# Altium PCB Rectifier-SinglePhase-FullControlled-TCA785.PcbDoc
Units mm, origin at the board's own origin, x right, y up, seen from the top; angles counter-clockwise.
Board outline 104.65 x 120.4 mm, 2 copper layers (Top Layer, Bottom Layer); 54 components, 44 nets, 155 pads, 4 vias.
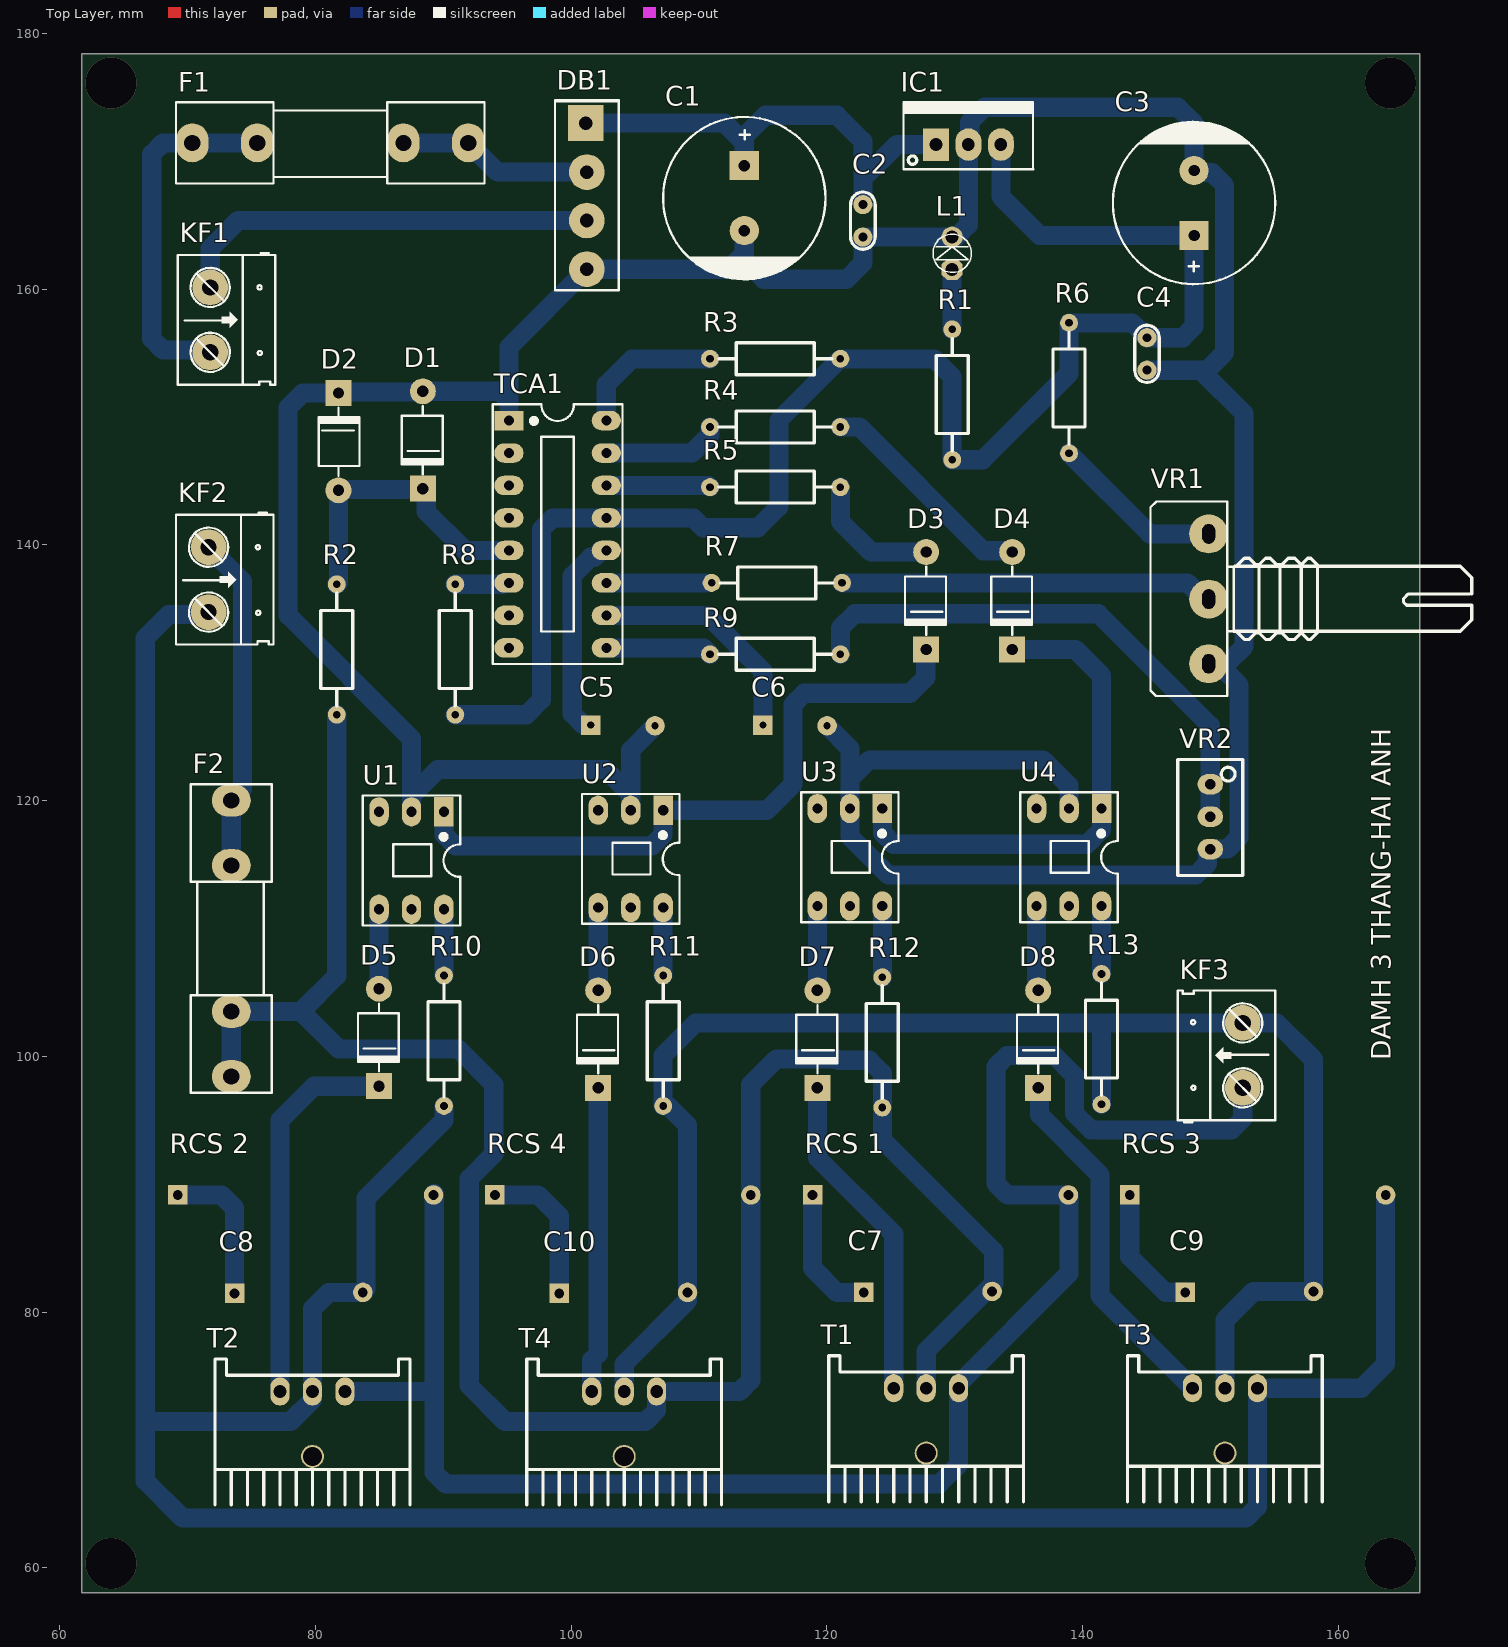
[diagram p0: Top Layer view]
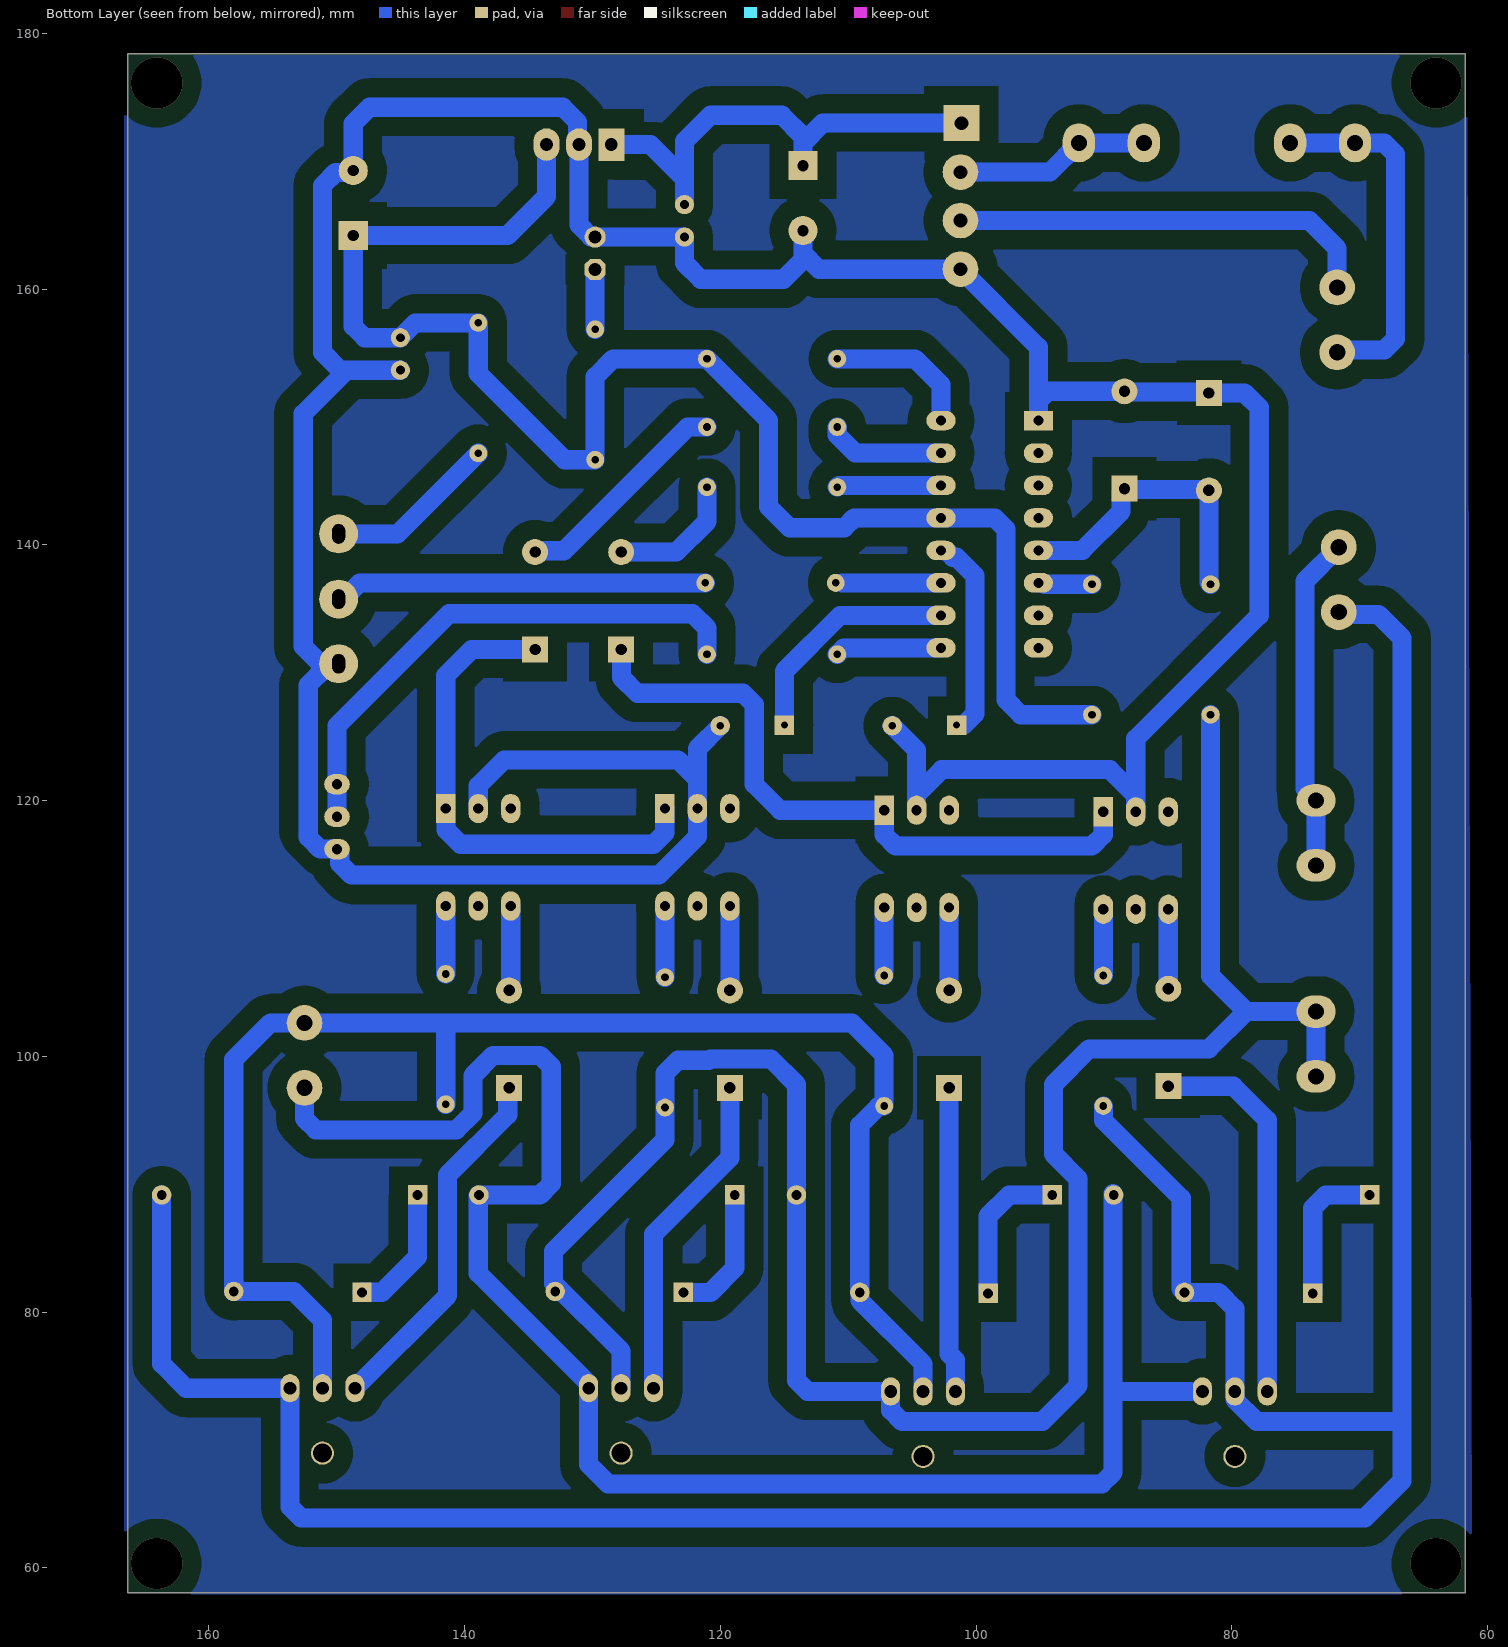
[diagram p1: Bottom Layer view, seen from below]
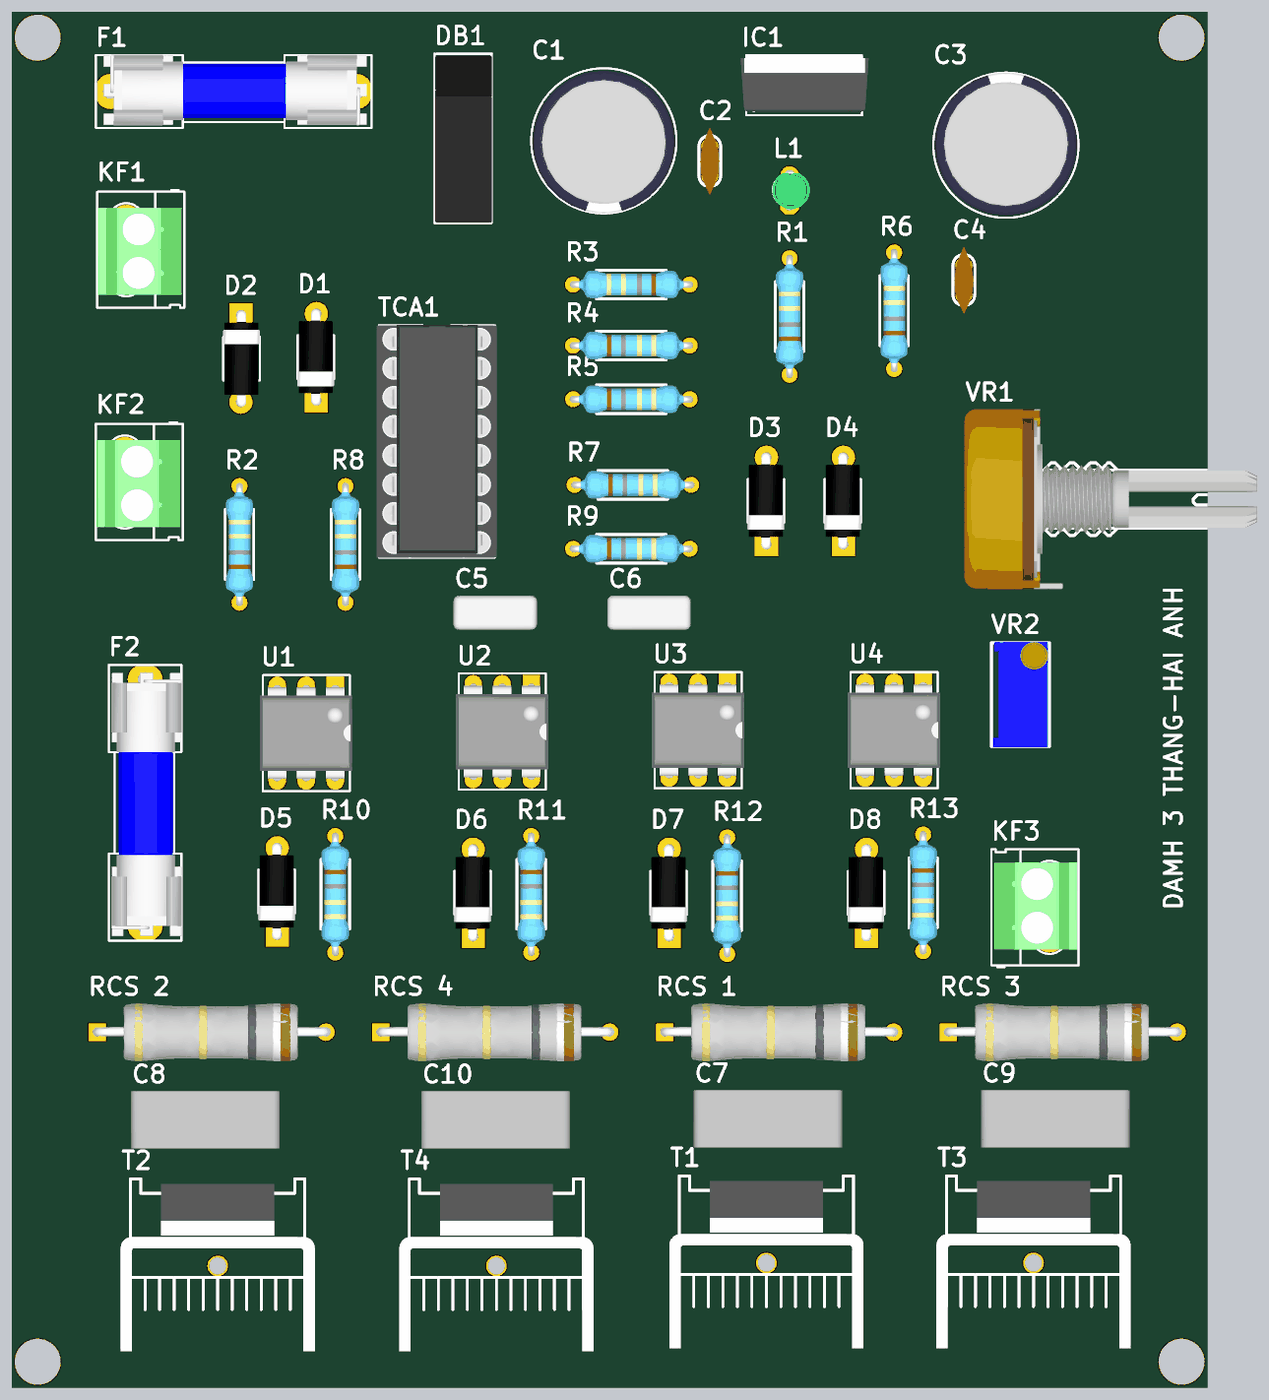
[diagram p2: 3D render of the assembled board from above, using the file's embedded part models]

## Layer stack, top to bottom
Top Solder: solder mask 0.0102, Solder Resist, Dk 3.5
Top Layer: signal copper 0.0356
Dielectric 1: dielectric 0.32, FR-4, Dk 4.8
Bottom Layer: signal copper 0.0356
Bottom Solder: solder mask 0.0102, Solder Resist, Dk 3.5

## Board outline
61.722,58.039 166.37,58.039 166.37,178.435 61.722,178.435

## Design rules (kind name [scope] priority, off if disabled: settings)
Clearance [All] p1: gap=0.5 ignorepadtopadclearanceinfootprint=FALSE
PolygonConnect [All] p1: connectstyle=Relief reliefconductorwidth=0.254 reliefentries=4 polygonreliefangle="90 Angle" airgapwidth=0.254
RoutingVias [All] p1: holewidth=0.711 width=1.27 viastyle="Through Hole" minholewidth=0.711 minwidth=1.27 maxholewidth=0.711 maxwidth=1.27
SolderMaskExpansion [All] p1: expansion=0.102 istentingtop=FALSE
Width [All] p1: maxlimit=3 minlimit=0.254 preferedwidth=1.5 minimp=50.000000 maximp=50.000000 favimp=50.000000
30 further rules are at their usual default settings.

## Components (designator, comment, footprint, x,y, rotation, side; value= is the part's Value field where it differs from the comment)
C1 "Cap Pol3" CP2/5 113.538,169.672 r270 top value=C?
C2 "104" "tu gom" 122.809,165.354 r270 top
C3 "Cap Pol3" CP2/5 148.717,164.211 r90 top value=C?
C4 "104" "tu gom" 145.034,154.94 r270 top
C5 "tu keo xanh" "tu keo xanh" 101.117,125.832 r0 top value=C?
C6 "tu keo xanh" "tu keo xanh" 114.579,125.832 r0 top value=C?
C7 "tukeotim" "tu keo" 123.063,81.534 r0 top value=C?
C8 "tukeotim" "tu keo" 73.838,81.458 r0 top value=C?
C9 "tukeotim" "tu keo" 148.209,81.534 r0 top value=C?
C10 "tukeotim" "tu keo" 99.238,81.458 r0 top value=C?
D1 "100v" "DIODE 1A" 88.392,153.289 r90 top
D2 "100v" "DIODE 1A" 81.788,143.002 r270 top
D3 "100v" "DIODE 1A" 127.762,140.716 r90 top
D4 "100v" "DIODE 1A" 134.493,140.716 r90 top
D5 "100v" "DIODE 1A" 84.963,106.553 r90 top
D6 "100v" "DIODE 1A" 102.108,106.426 r90 top
D7 "100v" "DIODE 1A" 119.253,106.426 r90 top
D8 "100v" "DIODE 1A" 136.525,106.426 r90 top
DB1 "3A 700V" "DIODE CAU 2A 3A CAM" 101.194,172.999 r270 top
F1 "520" "De Cau Chi 520 630" 81.153,171.45 r0 top
F2 "520" "De Cau Chi 520 630" 73.406,109.22 r270 top
IC1 "LM7805" QTO-220 128.524,171.323 r0 top
KF1 "CON 2 KF301" "Con 2 KF301 5.08" 71.755,160.147 r270 top
KF2 "CON 2 KF301" "Con 2 KF301 5.08" 71.628,139.827 r270 top
KF3 "CON 2 KF301" "Con 2 KF301 5.08" 152.527,97.536 r90 top
L1 "LED 3mm" LED-3MM-GREEN 129.794,161.544 r90 top
R1 "1.2k" "tro vach 1/4w" 129.794,151.765 r270 top
R2 "5m" "tro vach 1/4w" 81.661,131.826 r270 top
R3 "10R" "tro vach 1/4w" 115.951,154.559 r0 top
R4 "220R" "tro vach 1/4w" 115.951,149.225 r180 top
R5 "220R" "tro vach 1/4w" 115.951,144.526 r180 top
R6 "1.5k" "tro vach 1/4w" 138.938,152.273 r270 top
R7 "2.2k" "tro vach 1/4w" 116.078,137.033 r180 top
R8 "10k" "tro vach 1/4w" 90.932,131.826 r270 top
R9 "22k" "tro vach 1/4w" 115.951,131.445 r180 top
R10 "22K" "tro vach 1/4w" 90.043,101.219 r90 top
R11 "22K" "tro vach 1/4w" 107.188,101.219 r90 top
R12 "22K" "tro vach 1/4w" 124.333,101.092 r90 top
R13 "22K" "tro vach 1/4w" 141.478,101.346 r90 top
"RCS 1" "Res" "TRO CONG SUAT" 118.872,89.154 r0 top value=47R/3W
"RCS 2" "Res" "TRO CONG SUAT" 69.215,89.154 r0 top value=47R/3W
"RCS 3" "Res" "TRO CONG SUAT" 143.688,89.154 r0 top value=47R/3W
"RCS 4" "Res" "TRO CONG SUAT" 94.031,89.154 r0 top value=47R/3W
T1 "SCR Thyristror" scr 122.377,74.066 r180 top
T2 "SCR Thyristror" scr 74.371,73.812 r180 top
T3 "SCR Thyristror" scr 145.745,74.066 r180 top
T4 "SCR Thyristror" scr 98.755,73.812 r180 top
TCA1 "S1" "DIP16/W0.3 - duplicate" 95.123,149.733 r270 top
U1 "MOC3020" DIP6 90.043,119.126 r180 top
U2 "MOC3020" DIP6 107.188,119.253 r180 top
U3 "MOC3020" DIP6 124.333,119.38 r180 top
U4 "MOC3020" DIP6 141.478,119.38 r180 top
VR1 "10K" "Bien Tro Volume Don" 149.86,130.708 r90 top
VR2 "100K" "Bien Tro Vi Chinh Dung" 149.987,118.745 r270 top

## Footprints (in the part's own frame and the unit in brackets; to place one, negate y for a bottom-side part, rotate by r counter-clockwise, add the part's x,y. Pads: shape width x height; smd on the part's side, far side on the other; paste and mask are expansions set on the pad)
"Bien Tro Vi Chinh Dung" [mm] "Bien tro vi chinh"
  oval 1.6x2 hole 0.8: 1(-2.54,0) 2(0,0) 3(2.54,0)
  silkscreen extent -4.47,-2.54 4.6,2.54, body extent -4.54,-2.4 4.66,2.4, height 12.02
"Bien Tro Volume Don" [mil] "Volume control single"
  round 120 hole 40 slot 60 at 0 deg: 1(0,0) 2(199,0) 3(400,0)
  silkscreen extent -99,-810 500,179, body extent -110,-818 510,188, height 839
"Con 2 KF301 5.08" [mil]
  round 110 hole 50: 1(0,0) 2(200,0)
  silkscreen extent -106,-100 300,200, body extent -45,-97 255,190, height 335
CP2/5 [mil] "Tu hoa 1000uF/25V,50V"
  rect 90x90 hole 35: 1(0,0)
  round 90 hole 35: 2(200,0)
  silkscreen extent -150,-250 350,250, body extent -142,-246 350,246, height 984
"De Cau Chi 520 630" [mil] "De Fuse"
  oval 100x120 hole 50: 1(-425,0) 1(-225,0) 2(225,0) 2(425,0)
  silkscreen extent -475,-125 475,125, body extent -448,-117 459,127, height 378
"DIODE 1A" [mil] "Diode 1A"
  round 80 hole 35: 1(-50,0)
  rect 80x80 hole 35: 2(-350,0)
  silkscreen extent -305,-61 -95,65, body extent -366,-61 -34,65, height 122
"DIODE CAU 2A 3A CAM" [mil] "DIODE CAU 2A 3A CAM"
  rect 110x110 hole 42: 1(0,-2)
  round 110 hole 42: 2(151,1) 3(300,1) 4(450,1)
  silkscreen extent -70,-97 515,100, body extent -62,-95 512,102, height 650
DIP6 [mil] "6 PIN, W 300mil, Pin to pin 100mil"
  rect 60x90 hole 31.5: 1(0,0)
  oval 60x90 hole 31.5: 2(100,0) 3(200,0) 4(200,300) 5(100,300) 6(0,300)
  silkscreen extent -50,-50 250,350, body extent -58,-7 260,307, height 170
"DIP16/W0.3 - duplicate" [mil] "16 PIN, W 300mil, Pin to pin 100mil"
  rect 60x90 hole 31: 1(0,0)
  oval 60x90 hole 31: 2(100,0) 3(200,0) 4(300,0) 5(400,0) 6(500,0) 7(600,0) 8(700,0) 9(700,300) 10(600,300) 11(500,300) 12(400,300) 13(300,300) 14(200,300) 15(100,300) 16(0,300)
  silkscreen extent -50,-50 750,350, body extent -52,-57 752,356, height 299
LED-3MM-GREEN [mil]
  oct 65x65 hole 40: 1(0,0)
  round 65 hole 40: 2(100,0)
  silkscreen extent -9,-59 109,59, body extent -15,-70 112,60, height 182
QTO-220 [mil]
  rect 80x100 hole 39: 1(0,0)
  oval 80x100 hole 39: 2(100,0) 3(200,0)
  silkscreen extent -100,-76 300,130, body extent -119,-64 322,121, height 755
scr [mm]
  oval 1.5x2.2 hole 1: 1(-7.925,0.025) 2(-5.385,0.025) 3(-2.845,0.025)
  round 1.8 hole 1.5: ""(-5.385,5.105)
  silkscreen extent -13,-2.51 2.24,8.92, body extent -13.88,-2.06 3.12,12.57, height 20
"TRO CONG SUAT" [mil]
  rect 60x60 hole 30: 1(0,0)
  round 60 hole 30: 2(788,0)
  body extent -16,-101 804,99, height 493
"tro vach 1/4w" [mm]
  round 1.4 hole 0.6: 1(-5.1,0) 2(5.1,0)
  silkscreen extent -4.39,-1.25 4.42,1.25, body extent -5.38,-1.2 5.38,1.2, height 2.41
"tu gom" [mm] "Tu gom mini"
  round 1.5 hole 0.7: 1(-1.27,0) 2(1.27,0)
  silkscreen extent -2.25,-0.97 2.22,0.97, body extent -2.92,-0.85 2.92,0.85, height 6.12
"tu keo" [mil]
  rect 60x60 hole 30: 1(-7,0)
  round 60 hole 30: 2(388,3)
  body extent -66,-97 446,100, height 411
"tu keo xanh" [mil]
  rect 60x60 hole 22.13: 1(16,3)
  round 60 hole 22.13: 2(214,1)
  body extent -29,-58 258,60, height 256

## Part data
C1 C3: library part "Cap Pol3_3", "Polarized Capacitor (Surface Mount)", LatestRevisionDate=17-Jul-2002, LatestRevisionNote="Re-released for DXP Platform.", PackageReference=C0805, Publisher="Altium Limited"
C2 C4: library part "Tu gom 104 50V", "Cắm", Chung_Loai=Cắm, Don_Vi=Con, Ma_Hang=MH004761, So_Chan=2, Ten_Linh_Kien="Tụ gốm 104 100nF 50V"
C5 C6: "Polarized Capacitor (Surface Mount)", LatestRevisionDate=17-Jul-2002, LatestRevisionNote="Re-released for DXP Platform.", PackageReference=C0805, Publisher="Altium Limited"
C7 C8 C9 C10: library part "tu keo tim", "Polarized Capacitor (Surface Mount)", LatestRevisionDate=17-Jul-2002, LatestRevisionNote="Re-released for DXP Platform.", PackageReference=C0805, Publisher="Altium Limited"
D1 D2 D3 D4 D5 D6 D7 D8: library part "Diode 1N4007", "Cắm", Chung_Loai=Cắm, Don_Vi=Con, Ma_Hang=MH001063, Ten_Linh_Kien="Diode 1N4007 1A (DIP)"
DB1: library part "Diode CAU 3A", "Cắm", Chung_Loai=cắm, Don_Vi=Con, Ma_Hang=MH001207, Ten_Linh_Kien="Diode Cầu 3A 700V KBP307 ( Vuông)"
F1 F2: library part "De Cau Chi 520 630", "5x20mm", Ma_Hang=MH001473, Ten="Đế Cầu Chì 5x20MM 6x30MM SMD01"
IC1: library part LM78xx, "On ap +, from + 5 to + 24VDC"
KF1 KF2 KF3: "Cắm", Chung_Loai=Cắm, Don_Vi=Con, Ma_Hang=MH000987, Ten_Linh_Kien="CON 2 KF301-2P 5.08MM Xanh Dương"
L1: library part "LED 3mm Xanh La", "Cắm", Chung_Loai=Cắm, Don_Vi=Con, Ma_Hang=MH001054, Ten_Linh_Kien="Led 3MM Phủ Xanh (10c)"
R1 R2 R3 R4 R5 R6 R7 R8 R9 R10 R11 R12 R13: library part "Tro Vach 1/4W 5% 1.2R", "Cắm", Chung_Loai=Cắm, Don_Vi=Con, Ma_Hang=MH007350, So_Chan=2, Ten_Linh_Kien="Trở Vạch 1/4w 5% 1.2R"
"RCS 1" "RCS 2" "RCS 3" "RCS 4": library part "TRO CONG SUAT", "Resistor", Manufacturer="Generic Components", Class=Passive, Published=08/06/2000, Publisher="Altium Hobart Technology Centre", SubClass=Resistor
T1 T2 T3 T4: library part SCR_1, DVDT=50MEG, IGT=40MA, IH=50MA, K1=1, K2=1, SimulationGenericComponent=True, TON=1US, TQ=20US, VDRM=50V, VTMIN=1V
TCA1: library part "TCA 785"
U1 U2 U3 U4: library part MOC3063M
VR1: library part "Triet Ap Don 5k", "Cắm", Chung_Loai=Cắm, Don_Vi=Con, Ma_Hang=MH001416, Ten_Linh_Kien="Triết Áp Đơn B5K"
VR2: library part "Bien Tro Tinh Chinh 100R Dung", "Cắm", Chung_Loai=Cắm, Don_Vi=Con, Ma_Hang=MH003235, Ten_Linh_Kien="Biến Trở VR 101-100R 3296W"

## Via types
v1: diameter 4, hole 4, Top Layer to Bottom Layer, 4 vias

## Nets (pads, with @x,y where several pads share a name; then routed paths per layer and width w, separated by ;. In a path a pad name is that pad's centre, name@x,y a point inside that pad or via, vN(x,y) a via of type N, cw(c..) or ccw(c..) an arc to the next point about the centre after c; other vN are vias at no path point)
+15V: C3.1 C4.1 IC1.3 R1.2 R3.2 R6.1 R8.2 TCA1.13 | length 123.9
  Bottom Layer w1.5: R8.2 96.5,126.726 97.663,127.889 97.663,141.234 98.542,142.113 TCA1.13 109.547,142.113 110.309,141.351 114.598,141.351 116.238,142.992 116.238,149.746 R3.2 128.397,154.559 129.794,153.162 R1.2 132.187,146.665 138.938,153.416 R6.1 143.871,157.373 C4.1 147.828,156.21 148.717,157.099 C3.1 136.652,164.211 133.604,167.259 IC1.3
GND: C1.2 C2.2 C3.2 C4.2 C5.2 C6.2 D1.1 D2.2 DB1.4 IC1.2 L1.2 TCA1.1 U1.2 U2.2 U3.2 U4.2 VR1.1 VR2.3 | length 286.9
  Bottom Layer w1.5: U1.2 87.508,119.131 87.508,120.401 89.535,122.428 102.687,122.428 104.648,120.467 ; 87.503,120.401 87.503,124.841 77.851,134.493 77.851,150.749 78.994,151.892 D2.2 81.852,151.956 88.328,151.956 D1.1 94.361,152.019 95.123,151.257 ; TCA1.1 95.123,151.257 ; U2.2 104.648,120.467 ; C5.2 106.553,125.851 104.648,123.946 104.648,120.467 ; 113.528,162.804 112.293,161.569 DB1.4 95.123,155.473 95.123,151.257 ; C1.2 113.538,162.306 115.062,160.782 121.539,160.782 122.809,162.052 C2.2 L1.2 129.823,164.113 130.139,164.113 131.064,165.038 IC1.2 131.166,171.425 131.166,173.076 132.334,174.244 147.447,174.244 148.717,172.974 C3.2 148.867,169.141 150.098,169.141 151.11,168.128 151.11,155.047 149.733,153.67 C4.2 ; C6.2 120.015,125.851 121.793,124.073 121.793,121.666 ; U3.2@121.793,120.517 121.793,121.666 ; U3.2@121.798,120.517 121.798,119.385 U3.2 121.798,119.375 121.798,117.184 124.808,114.173 148.858,114.173 149.768,115.083 149.768,116.159 149.791,116.182 VR2.3@149.987,116.182 ; U4.2 138.933,119.385 138.933,121.163 136.906,123.19 123.317,123.19 121.793,121.666 ; 149.225,153.67 152.634,150.261 152.634,132.06 151.282,130.708 VR1.1 ; VR2.3@150.006,116.224 151.327,116.224 152.237,117.134 152.237,129.056 VR1.1@150.881,130.412
L: F2.1 KF2.1 | length 26.3
  Bottom Layer w1.5: KF2.1 74.275,137.18 74.275,120.911 73.406,120.042 73.406,120.015 F2.1@73.406,114.935
L1: "RCS 4.2" C7.2 F2.2 R2.2 R12.1 T1.2 T4.1 | length 167.3
  Bottom Layer w1.5: F2.2@73.406,98.425 73.406,103.505 78.867,103.505 ; R2.2 81.661,106.299 78.867,103.505 ; T1.2 127.762,76.962 133.045,82.245 133.045,84.76 124.333,93.472 R12.1 124.333,98.679 123.317,99.695 120.894,99.695 120.787,99.802 116.058,99.802 114.046,97.79 114.046,89.154 114.046,74.666 113.167,73.787 T4.1 106.68,72.316 105.801,71.437 94.822,71.437 92.019,74.24 92.019,90.434 93.944,92.359 93.944,97.805 91.164,100.584 81.788,100.584 78.867,103.505
N: "RCS 3.2" C8.2 KF2.2 R10.1 T2.2 T3.1 | length 236.3
  Bottom Layer w1.5: KF2.2 71.438,134.557 68.517,134.557 66.675,132.715 66.675,71.12 ; R10.1 90.043,94.996 83.947,88.9 83.947,81.794 83.693,81.54 C8.2 81.026,81.534 79.756,80.264 T2.2 79.756,73.149 78.044,71.437 66.992,71.437 66.675,71.12 ; 163.703,89.154 163.703,75.946 161.798,74.041 T3.1 153.67,64.76 152.791,63.881 69.596,63.881 66.675,66.802 66.675,71.12
NetC1_1: C1.1 C2.1 DB1.1 IC1.1 | length 37.9
  Bottom Layer w1.5: DB1.1 111.989,172.999 113.538,171.45 ; C1.1 113.538,171.958 115.189,173.609 120.777,173.609 122.809,171.577 122.809,168.656 ; C2.1 122.809,168.656 ; IC1.1 125.476,171.323 122.809,168.656
NetC5_1: C5.1 TCA1.12 | length 16.1
  Bottom Layer w1.5: C5.1 101.512,125.92 100.955,125.92 100.076,126.798 100.076,137.592 101.529,139.045 101.828,139.045 102.356,139.573 TCA1.12
NetC6_1: C6.1 TCA1.10 | length 18.3
  Bottom Layer w1.5: TCA1.10 110.631,134.493 114.986,130.139 C6.1 C6.1@114.974,125.92
NetC7_1: "RCS 1.1" C7.1 | length 10.5
  Bottom Layer w1.5: 118.872,89.154 118.872,83.439 120.777,81.534 C7.1
NetC8_1: "RCS 2.1" C8.1 | length 11.5
  Bottom Layer w1.5: 69.215,89.154 72.644,89.154 73.66,88.138 C8.1
NetC9_1: "RCS 3.1" C9.1 | length 10.3
  Bottom Layer w1.5: 143.688,89.154 143.688,84.328 146.47,81.546 148.019,81.546 C9.1
NetC10_1: "RCS 4.1" C10.1 | length 11.8
  Bottom Layer w1.5: 94.031,89.154 97.409,89.154 99.06,87.503 C10.1
NetD1_2: D1.2 D2.1 R2.1 TCA1.5 | length 23.7
  Bottom Layer w1.5: R2.1 81.788,137.053 D2.1 81.852,144.335 88.328,144.335 D1.2 88.658,144.133 88.658,142.609 91.689,139.578 95.118,139.578 TCA1.5
NetD3_1: D3.1 R5.1 | length 10.4
  Bottom Layer w1.5: R5.1 121.051,141.839 123.444,139.446 D3.1
NetD4_1: D4.1 R4.1 | length 17.5
  Bottom Layer w1.5: R4.1 122.555,149.225 132.232,139.548 134.391,139.548 D4.1
NetD5_1: D5.1 U1.4 | length 6.2
  Bottom Layer w1.5: D5.1 U1.4
NetD6_1: D6.1 U2.4 | length 6.5
  Bottom Layer w1.5: D6.1 U2.4
NetD7_1: D7.1 U3.4 | length 6.6
  Bottom Layer w1.5: D7.1 U3.4
NetD8_1: D8.1 U4.4 | length 6.7
  Bottom Layer w1.5: U4.4 136.398,105.427 136.525,105.3 D8.1
NetDB1_2: DB1.2 F1.2 | length 15.3
  Bottom Layer w1.5: F1.2@86.868,171.45 91.948,171.45 94.234,169.164 DB1.2
NetDB1_3: DB1.3 KF1.1 | length 33.4
  Bottom Layer w1.5: KF1.1 71.755,163.195 73.939,165.379 DB1.3
NetF1_1: F1.1 KF1.2 | length 28.1
  Bottom Layer w1.5: KF1.2 71.565,155.257 68.062,155.257 67.183,156.135 67.183,170.571 68.062,171.45 F1.1@75.438,171.45
NetL1_1: L1.1 R1.1 | length 4.7
  Bottom Layer w1.5: R1.1 L1.1
NetR3_1: R3.1 TCA1.16 | length 11.7
  Bottom Layer w1.5: TCA1.16 102.743,152.527 104.775,154.559 R3.1
NetR4_2: R4.2 TCA1.15 | length 9.3
  Bottom Layer w1.5: TCA1.15@102.748,147.198 109.449,147.198 110.851,148.6 R4.2
NetR5_2: R5.2 TCA1.14 | length 8.2
  Bottom Layer w1.5: TCA1.14 110.724,144.653 R5.2
NetR6_2: R6.2 VR1.3 | length 13.5
  Bottom Layer w1.5: R6.2 145.243,140.868 VR1.3
NetR7_1: R7.1 VR1.2 | length 29.2
  Bottom Layer w1.5: R7.1 148.207,137.033 149.477,135.763 VR1.2
NetR7_2: R7.2 TCA1.11 | length 7.7
  Bottom Layer w1.5: TCA1.11 R7.2@110.47,137.033
NetR8_1: R8.1 TCA1.6 | length 4.2
  Bottom Layer w1.5: R8.1 94.629,136.926 94.736,137.033 TCA1.6
NetR9_1: R9.1 VR2.1 VR2.2 | length 42.2
  Bottom Layer w1.5: R9.1 121.051,133.497 122.174,134.62 141.224,134.62 149.987,125.857 VR2.2
NetR9_2: R9.2 TCA1.9 | length 8.3
  Bottom Layer w1.5: TCA1.9 110.343,131.953 R9.2
NetR10_2: R10.2 U1.6 | length 5.2
  Bottom Layer w1.5: R10.2 U1.6
NetR11_2: R11.2 U2.6 | length 5.3
  Bottom Layer w1.5: R11.2 U2.6
NetR12_2: R12.2 U3.6 | length 5.6
  Bottom Layer w1.5: R12.2 U3.6
NetR13_2: R13.2 U4.6 | length 5.3
  Bottom Layer w1.5: R13.2 U4.6
OUTPUT1: "RCS 1.2" "RCS 2.2" KF3.1 T1.1 T2.1 | length 136.9
  Bottom Layer w1.5: T2.1 89.281,73.787 ; 89.281,89.255 89.281,73.787 ; T1.1 130.302,68.072 128.787,66.557 90.16,66.557 89.281,67.436 89.281,73.787 ; T1.1@130.302,74.391 138.938,83.027 138.938,89.097 138.892,89.143 138.892,89.148 138.898,89.154 ; 138.887,89.154 134.112,89.154 133.223,90.043 133.223,99.197 134.102,100.076 137.785,100.076 139.354,98.507 139.354,95.541 140.65,94.246 151.648,94.246 152.527,95.125 KF3.1
OUTPUT2: C9.2 C10.2 KF3.2 R11.1 R13.1 T3.2 T4.2 | length 119.7
  Bottom Layer w1.5: T4.2 104.14,75.946 109.088,80.894 109.088,81.529 C10.2 109.093,94.615 R11.1@107.644,96.064 ; R11.1 107.188,100.076 109.728,102.616 141.478,102.616 ; R13.1 141.478,102.616 ; T3.2 151.13,79.375 153.365,81.61 C9.2 158.064,99.746 155.194,102.616 141.478,102.616
T1: D7.2 T1.3 | length 26
  Bottom Layer w1.5: D7.2 119.253,92.065 125.222,86.096 T1.3
T2: D5.2 T2.3 | length 30.1
  Bottom Layer w1.5: T2.3 77.216,94.996 79.883,97.663 D5.2
T3: D8.2 T3.3 | length 28.5
  Bottom Layer w1.5: D8.2 136.635,97.426 136.635,95.432 141.351,90.716 141.351,81.28 T3.3
T4: D6.2 T4.3 | length 24
  Bottom Layer w1.5: T4.3 101.6,76.234 102.108,76.742 D6.2
"XUNG DK 14": D3.2 U1.1 U2.1 | length 52.3
  Bottom Layer w1.5: U1.1 90.055,119.114 90.055,117.338 90.934,116.459 106.297,116.459 107.176,117.338 107.176,119.241 U2.1 115.316,119.253 117.348,121.285 117.348,127.518 118.227,128.397 126.492,128.397 127.735,129.64 127.735,131.799 D3.2
"XUNG DK 15": D4.2 U3.1 U4.1 | length 39.8
  Bottom Layer w1.5: U3.1 124.345,119.368 124.345,117.465 125.224,116.586 140.335,116.586 141.466,117.717 141.466,119.368 U4.1 141.478,129.794 139.446,131.826 D4.2
pads on no net: T1. T2. T3. T4. TCA1.2 TCA1.3 TCA1.4 TCA1.7 TCA1.8 U1.3 U1.5 U2.3 U2.5 U3.3 U3.5 U4.3 U4.5
copper on no net:
  other v1: 64.008,60.325 164.084,60.325 64.008,176.149 164.084,176.149

## Polygon pours and split planes (outlines as drawn)
no net on Bottom Layer "NONET_L02_P000" (solid, pour order 0): 61.595,178.562 61.849,178.308 166.624,178.308 166.624,58.42 166.116,57.912 61.214,57.912

## Silkscreen, mask and mechanical layers (free items; w line width, h text height)
Top Overlay:
  text "DAMH 3 THANG-HAI ANH" at 164.084,99.695 h1.52 r90